# Altium PCB BBB_parport.PcbDoc (part 1 of 2)
Units mil, origin at the board's own origin, x right, y up, seen from the top; angles counter-clockwise.
Board outline 3588.03 x 5478.78 mil, 2 copper layers (Top Layer, Bottom Layer); 87 components, 119 nets, 505 pads, 175 vias.
Unrouted connection lines stored in the file: 1.
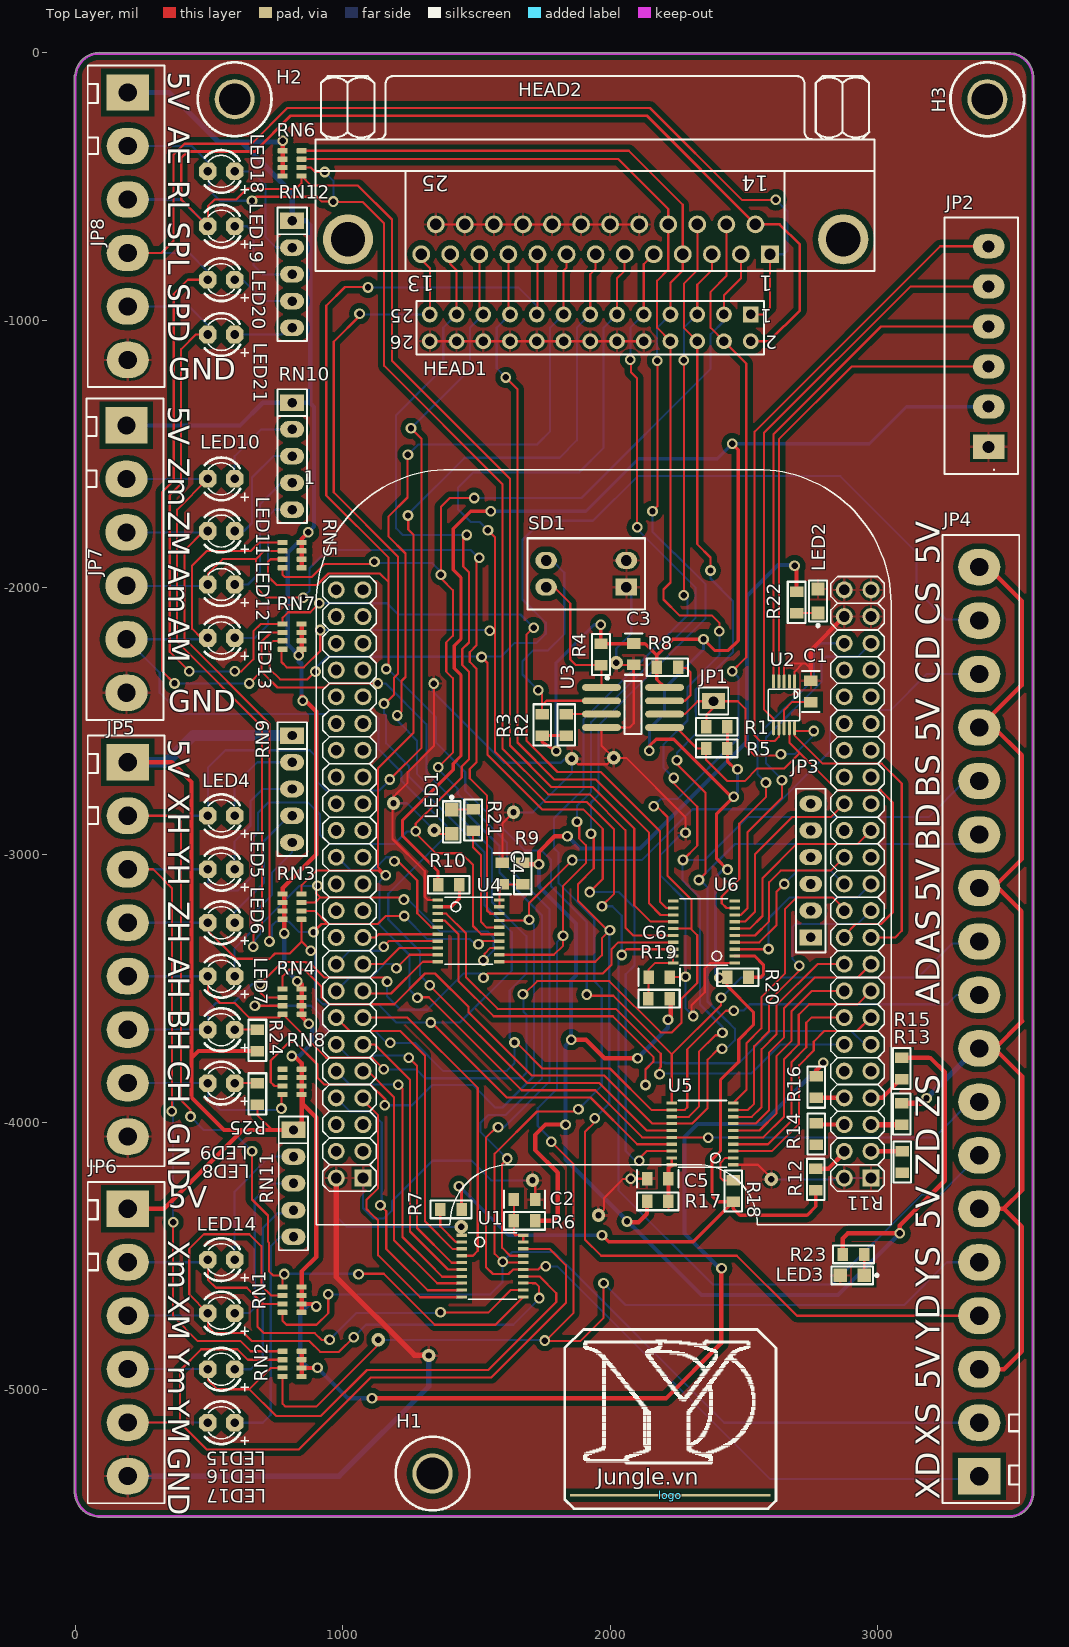
[diagram p0: Top Layer view]
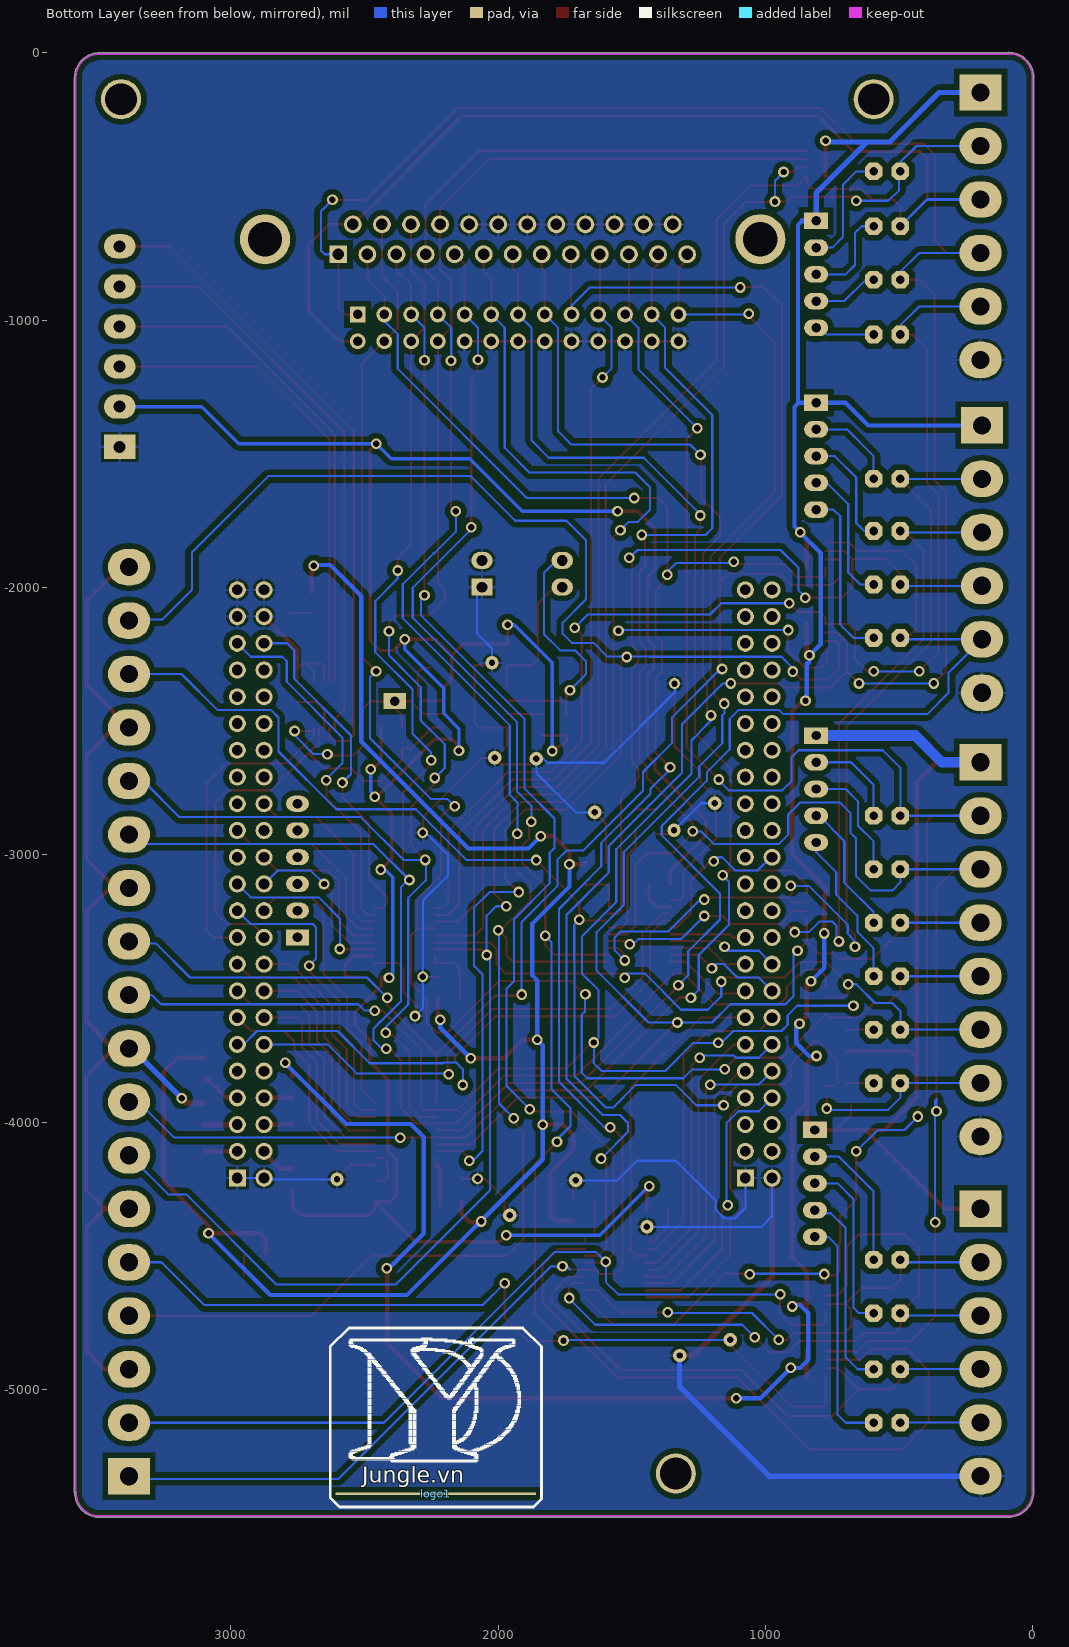
[diagram p1: Bottom Layer view, seen from below]
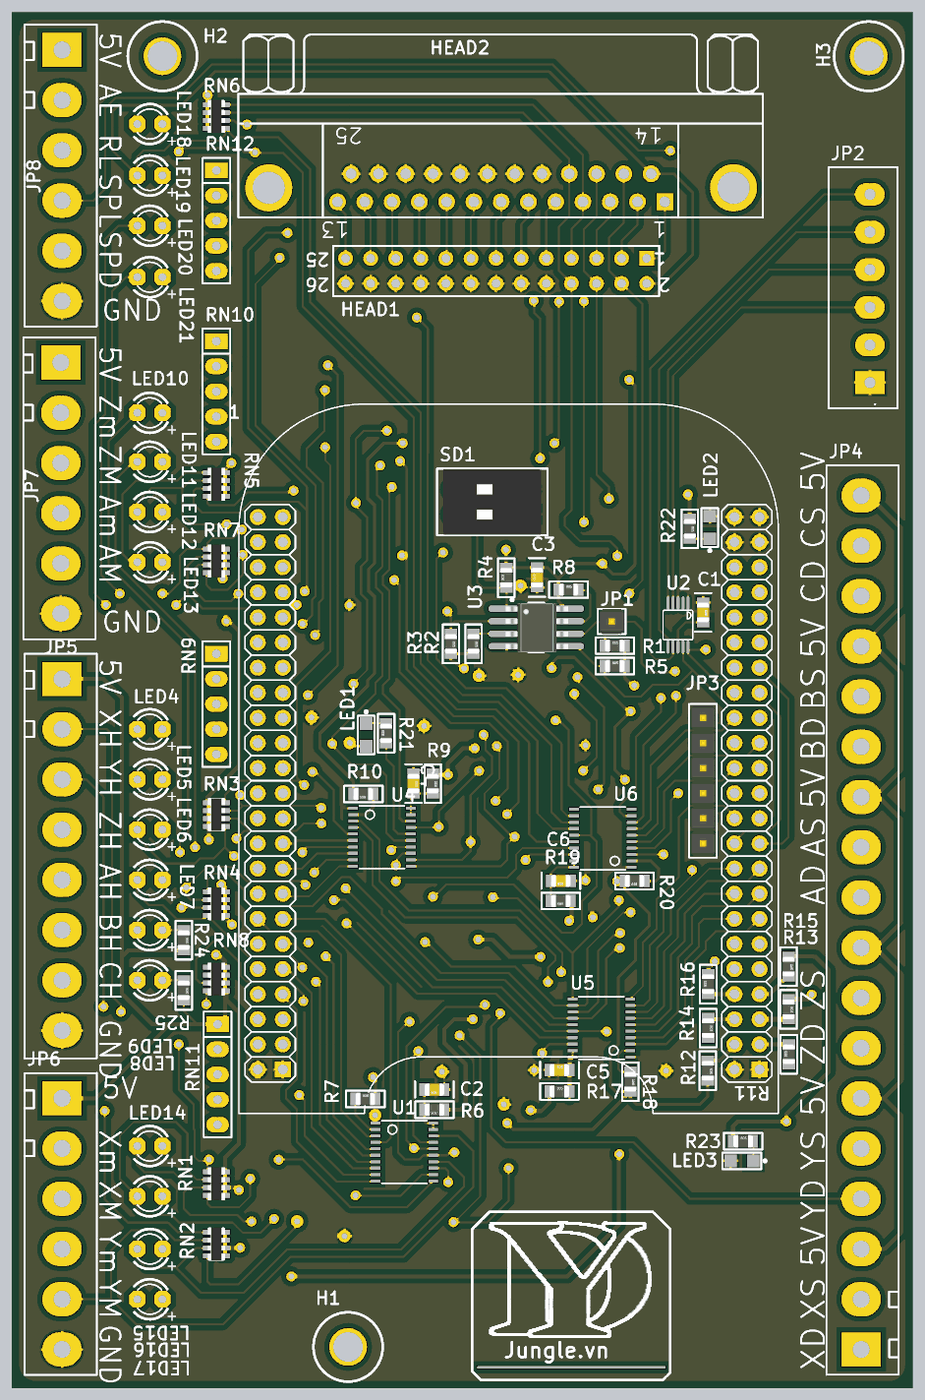
[diagram p3: 3D render of the assembled board from above, using the file's embedded part models]

## Layer stack, top to bottom
Top Solder: solder mask 0.4, Solder Resist, Dk 3.5
Top Layer: signal copper 1.4
Dielectric 1: dielectric 12.6, FR-4, Dk 4.8
Bottom Layer: signal copper 1.4
Bottom Solder: solder mask 0.4, Solder Resist, Dk 3.5

## Board outline
-2.67,-5390.72 ccw(c91.02,-5382.91) 84.7,-5476.72 ccw(c87.48,-5473.82) 87.48,-5477.83 3489.83,-5477.83 ccw(c3490.39,-5473.86) 3490.39,-5477.87 ccw(c3490.39,-5383.86) 3493.12,-5477.83 3495.87,-5477.83 ccw(c3495.87,-5473.82) 3497.12,-5477.63 ccw(c3490.39,-5383.86) 3584.38,-5386.16 ccw(c3580.83,-5384.29) 3584.84,-5384.29 3584.84,-93.82 ccw(c3490.83,-93.82) 3490.83,0.2 93.5,0.2 ccw(c91.22,-3.11) 91.22,0.9 ccw(c91.22,-93.11) -2.2,-82.56 ccw(c0.83,-85.2) -3.19,-85.2 -3.19,-5388.74 ccw(c0.83,-5388.74)

## Design rules (kind name [scope] priority, off if disabled: settings)
Clearance [All] p1: gap=20
PolygonConnect [All] p1: connectstyle=Relief reliefconductorwidth=10 reliefentries=4 polygonreliefangle="90 Angle" airgapwidth=10
RoutingVias [All] p1: holewidth=24 width=40 viastyle="Through Hole" minholewidth=24 minwidth=40 maxholewidth=24 maxwidth=40
SolderMaskExpansion [All] p1: expansion=4
Width [All] p1: maxlimit=40 minlimit=8 preferedwidth=10
29 further rules are at their usual default settings.

## Components (designator, comment, footprint, x,y, rotation, side; value= is the part's Value field where it differs from the comment)
1 "Should match A3 pinout - but not completely tested" BEAGLEBONE_SHIELD 1075.83,-4208.82 r0 top
C1 "F" 0805_C 2750.83,-2388.82 r270 top
C2 "F" 0805_C 1679.96,-4288.94 r180 top
C3 "F" 0805_C 2088.54,-2249.53 r90 top
C4 "F" 0805_C 1596.97,-3070.28 r270 top
C5 "F" 0805_C 2178.31,-4211.18 r0 top
C6 "F" 0805_C 2183.98,-3457.36 r180 top
H1 "Hole 3mm" HOLE_3MM 1335.83,-5313.82 r0 top
H2 "Hole 3mm" HOLE_3MM 595.83,-173.82 r0 top
H3 "Hole 3mm" HOLE_3MM 3410.83,-173.82 r0 top
HEAD1 "Head26" HEAD13X2 2525.83,-978.82 r180 top
HEAD2 "Head25" DB25_MALE 1945.83,-323.82 r180 top
JP1 "JP2" HEAD1 2405.83,-2403.82 r90 top
JP2 "JP6" Domino6_381 3415.83,-1473.82 r90 top
JP3 "JP6" HEAD6 2750.83,-3308.82 r90 top
JP4 "JP2" DOMINO18_508 3380.83,-5323.82 r90 top
JP5 "JP8" DOMINO8_508 195.83,-2653.82 r270 top
JP6 "JP6" DOMINO6_508 195.83,-4323.46 r270 top
JP7 "JP6" DOMINO6_508 190.83,-1393.82 r270 top
JP8 "JP6" DOMINO6_508 195.83,-148.82 r270 top
LED1 "LED0805" 0805_LED 1407.76,-2876.65 r270 top
LED2 "LED0805" 0805_LED 2777.56,-2050.51 r90 top
LED3 "LED0805" 0805_LED 2905.67,-4572.8 r180 top
LED4 "" LED3MM 545.83,-2853.82 r180 top
LED5 "" LED3MM 545.83,-3053.82 r180 top
LED6 "" LED3MM 545.83,-3253.82 r180 top
LED7 "" LED3MM 545.83,-3453.82 r180 top
LED8 "" LED3MM 545.83,-3653.82 r180 top
LED9 "" LED3MM 545.83,-3853.82 r180 top
LED10 "" LED3MM 545.83,-1593.82 r180 top
LED11 "" LED3MM 545.83,-1788.82 r180 top
LED12 "" LED3MM 545.83,-1988.82 r180 top
LED13 "" LED3MM 545.83,-2188.82 r180 top
LED14 "" LED3MM 545.83,-4513.82 r180 top
LED15 "" LED3MM 545.83,-4713.82 r180 top
LED16 "" LED3MM 545.83,-4923.82 r180 top
LED17 "" LED3MM 545.83,-5123.82 r180 top
LED18 "" LED3MM 545.83,-443.82 r180 top
LED19 "" LED3MM 545.83,-648.82 r180 top
LED20 "" LED3MM 545.83,-848.82 r180 top
LED21 "" LED3MM 545.83,-1053.82 r180 top
logo "DY_LOGO1" DYLOGO4 2225.31,-5395.08 r0 top
logo1 "DY_LOGO1" DYLOGO4 2233.46,-5389.29 r180 bottom
R1 "0805_R" 0805_R 2398.94,-2520.98 r180 top
R2 "0805_R" 0805_R 1835.83,-2513.82 r90 top
R3 "0805_R" 0805_R 1745.83,-2513.82 r90 top
R4 "0805_R" 0805_R 1966.06,-2250.35 r270 top
R5 "0805_R" 0805_R 2398.94,-2602.05 r180 top
R6 "0805_R" 0805_R 1679.96,-4368.94 r0 top
R7 "0805_R" 0805_R 1404.65,-4326.14 r180 top
R8 "0805_R" 0805_R 2214.21,-2297.87 r180 top
R9 "0805_R" 0805_R 1673.15,-3070.28 r90 top
R10 "0805_R" 0805_R 1396.5,-3111.61 r0 top
R11 "0805_R" 0805_R 3092.44,-4148.35 r270 top
R12 "0805_R" 0805_R 2769.45,-4213.5 r90 top
R13 "0805_R" 0805_R 3091.14,-3969.29 r90 top
R14 "0805_R" 0805_R 2770.83,-4043.82 r90 top
R15 "0805_R" 0805_R 3091.14,-3799.17 r90 top
R16 "0805_R" 0805_R 2770.83,-3868.82 r270 top
R17 "0805_R" 0805_R 2178.31,-4296.18 r180 top
R18 "0805_R" 0805_R 2460.75,-4257.56 r90 top
R19 "0805_R" 0805_R 2183.5,-3537.56 r0 top
R20 "0805_R" 0805_R 2477.68,-3457.83 r0 top
R21 "0805_R" 0805_R 1487.52,-2869.96 r270 top
R22 "0805_R" 0805_R 2697.56,-2055.51 r90 top
R23 "0805_R" 0805_R 2910.28,-4494.53 r180 top
R24 "0805_R" 0805_R 680.83,-3693.82 r90 top
R25 "0805_R" 0805_R 680.83,-3893.82 r90 top
RN1 "4K7" RESCAXS50P160X320X70-8N 810.83,-4663.82 r0 top
RN2 "4K7" RESCAXS50P160X320X70-8N 810.83,-4903.82 r0 top
RN3 "4K7" RESCAXS50P160X320X70-8N 810.83,-3193.82 r180 top
RN4 "4K7" RESCAXS50P160X320X70-8N 810.83,-3548.82 r0 top
RN5 "4K7" RESCAXS50P160X320X70-8N 810.83,-1878.82 r0 top
RN6 "4K7" RESCAXS50P160X320X70-8N 810.83,-413.82 r180 top
RN7 "4K7" RESCAXS50P160X320X70-8N 810.83,-2183.82 r0 top
RN8 "4K7" RESCAXS50P160X320X70-8N 810.83,-3848.82 r0 top
RN9 "330R" RN4_THROUGHHOLE 810.83,-2553.82 r270 top
RN10 "330R" RN4_THROUGHHOLE 810.83,-1308.82 r270 top
RN11 "330R" RN4_THROUGHHOLE 815.83,-4028.82 r270 top
RN12 "330R" RN4_THROUGHHOLE 810.83,-628.82 r270 top
SD1 "SW - DIP2" SW_DIP_2POS_THR 1910.83,-1948.82 r90 top
U1 "GTL2003" TSSOP20 1560.2,-4537.52 r270 top
U2 "ADS1015" VSSOP10 2650.83,-2438.82 r270 top
U3 "24LC256/SO" SOIC8_Wide 2085.83,-2448.82 r0 top
U4 "GTL2003" TSSOP20 1470.83,-3283.82 r270 top
U5 "GTL2003" TSSOP20 2345.83,-4043.82 r90 top
U6 "GTL2003" TSSOP20 2350.83,-3288.82 r90 top

## Footprints (in the part's own frame and the unit in brackets; to place one, negate y for a bottom-side part, rotate by r counter-clockwise, add the part's x,y. Pads: shape width x height; smd on the part's side, far side on the other; paste and mask are expansions set on the pad)
0805_C [mil] "Chip Resistor; Body 2.0 x 1.3 mm (LxW typ)"
  rect 39.37x50 smd: 1(-40,0) 2(40,0)
  silkscreen extent -77,-33 77,33, body extent -39,-25 39,25, height 31
0805_LED [mil] "Chip Resistor; Body 2.0 x 1.3 mm (LxW typ)"
  rect 50x50 smd: 1(-45,0) 2(45,0)
  silkscreen extent -97,-33 77,33, body extent -60,-25 60,25, height 47
0805_R [mil] "Chip Resistor; Body 2.0 x 1.3 mm (LxW typ)"
  rect 39.37x50 smd: 1(-40,0) 2(40,0)
  silkscreen extent -77,-33 77,33, body extent -39,-25 39,25, height 31
BEAGLEBONE_SHIELD [mm]
  rect 1.62x1.62 hole 1.016: 1(0,0) 47(48.26,0)
  round 1.62 hole 1.016: 2(-2.54,0) 3(0,2.54) 4(-2.54,2.54) 5(0,5.08) 6(-2.54,5.08) 7(0,7.62) 8(-2.54,7.62) 9(0,10.16) 10(-2.54,10.16) 11(0,12.7) 12(-2.54,12.7) 13(0,15.24) 14(-2.54,15.24) 15(0,17.78) 16(-2.54,17.78) 17(0,20.32) 18(-2.54,20.32) 19(0,22.86) 20(-2.54,22.86) 21(0,25.4) 22(-2.54,25.4) 23(0,27.94) 24(-2.54,27.94) 25(0,30.48) 26(-2.54,30.48) 27(0,33.02) 28(-2.54,33.02) 29(0,35.56) 30(-2.54,35.56) 31(0,38.1) 32(-2.54,38.1) 33(0,40.64) 34(-2.54,40.64) 35(0,43.18) 36(-2.54,43.18) 37(0,45.72) 38(-2.54,45.72) 39(0,48.26) 40(-2.54,48.26) 41(0,50.8) 42(-2.54,50.8) 43(0,53.34) 44(-2.54,53.34) 45(0,55.88) 46(-2.54,55.88) 48(45.72,0) 49(48.26,2.54) 50(45.72,2.54) 51(48.26,5.08) 52(45.72,5.08) 53(48.26,7.62) 54(45.72,7.62) 55(48.26,10.16) 56(45.72,10.16) 57(48.26,12.7) 58(45.72,12.7) 59(48.26,15.24) 60(45.72,15.24) 61(48.26,17.78) 62(45.72,17.78) 63(48.26,20.32) 64(45.72,20.32) 65(48.26,22.86) 66(45.72,22.86) 67(48.26,25.4) 68(45.72,25.4) 69(48.26,27.94) 70(45.72,27.94) 71(48.26,30.48) 72(45.72,30.48) 73(48.26,33.02) 74(45.72,33.02) 75(48.26,35.56) 76(45.72,35.56) 77(48.26,38.1) 78(45.72,38.1) 79(48.26,40.64) 80(45.72,40.64) 81(48.26,43.18) 82(45.72,43.18) 83(48.26,45.72) 84(45.72,45.72) 85(48.26,48.26) 86(45.72,48.26) 87(48.26,50.8) 88(45.72,50.8) 89(48.26,53.34) 90(45.72,53.34) 91(48.26,55.88) 92(45.72,55.88)
  silkscreen extent -4.44,-4.44 50.16,67.31
DB25_MALE [mm] "Connector; D Subminiature AMPLIMITE 2000; 25 Position; Right Angle"
  rect 1.69x1.69 hole 1.09: 1(-16.566,10.92)
  round 1.69 hole 1.09: 2(-13.805,10.92) 3(-11.044,10.92) 4(-8.283,10.92) 5(-5.522,10.92) 6(-2.761,10.92) 7(0,10.92) 8(2.761,10.92) 9(5.522,10.92) 10(8.283,10.92) 11(11.044,10.92) 12(13.805,10.92) 13(16.566,10.92) 14(-15.185,8.08) 15(-12.424,8.08) 16(-9.663,8.08) 17(-6.902,8.08) 18(-4.141,8.08) 19(-1.38,8.08) 20(1.381,8.08) 21(4.142,8.08) 22(6.903,8.08) 23(9.664,8.08) 24(12.425,8.08) 25(15.186,8.08)
  round 4.76 hole 3.26: ""(-23.526,9.5) ""(23.526,9.5)
  silkscreen extent -26.5,-6 26.6,12.5
Domino6_381 [mm]
  rect 2.29x3 hole 1.14: 1(0,0)
  oval 2.29x3 hole 1.14: 2(3.81,0) 3(7.62,0) 4(11.43,0) 5(15.24,0) 6(19.05,0)
  silkscreen extent -2.6,-2.77 21.78,4.2
DOMINO6_508 [mil]
  rect 136x157.48 hole 68: 1(0,0)
  oval 135.98x157.48 hole 68: 2(200,0) 3(400,0) 4(600,0) 5(800,0) 6(1000,0)
  silkscreen extent -101,-150 1101,138
DOMINO8_508 [mil]
  rect 136x157.48 hole 68: 1(0,0)
  oval 135.98x157.48 hole 68: 2(200,0) 3(400,0) 4(600,0) 5(800,0) 6(1000,0) 7(1200,0) 8(1400,0)
  silkscreen extent -101,-150 1511,138
DOMINO18_508 [mil]
  rect 136x157.48 hole 68: 1(0,0)
  oval 135.98x157.48 hole 68: 2(200,0) 3(400,0) 4(600,0) 5(800,0) 6(1000,0) 7(1200,0) 8(1400,0) 9(1600,0) 10(1800,0) 11(2000,0) 12(2200,0) 13(2400,0) 14(2600,0) 15(2800,0) 16(3000,0) 17(3200,0) 18(3400,0)
  silkscreen extent -101,-150 3521,138
DYLOGO4 [mil]
  rect 750x10 smd: 0(0,0)
  silkscreen extent -395,-50 395,620
HEAD1 [mil]
  rect 60x85 hole 36: 1(-21.51,19.13)
  silkscreen extent -72,-36 30,74, body extent -72,-31 28,69, height 374
HEAD6 [mil]
  rect 60x85 hole 36: 1(0,0)
  oval 60x85 hole 36: 2(100,0) 3(200,0) 4(300,0) 5(400,0) 6(500,0)
  silkscreen extent -56,-55 556,56, body extent -50,-50 550,50, height 374
HEAD13X2 [mm] "Connector; Header; 13x2 Position; Right Angle"
  rect 1.5x1.5 hole 0.9: 1(0,0)
  round 1.5 hole 0.9: 2(0,2.54) 3(2.54,0) 4(2.54,2.54) 5(5.08,0) 6(5.08,2.54) 7(7.62,0) 8(7.62,2.54) 9(10.16,0) 10(10.16,2.54) 11(12.7,0) 12(12.7,2.54) 13(15.24,0) 14(15.24,2.54) 15(17.78,0) 16(17.78,2.54) 17(20.32,0) 18(20.32,2.54) 19(22.86,0) 20(22.86,2.54) 21(25.4,0) 22(25.4,2.54) 23(27.94,0) 24(27.94,2.54) 25(30.48,0) 26(30.48,2.54)
  silkscreen extent -1.27,-1.27 31.75,3.81
HOLE_3MM [mil]
  round 150 hole 118: 0(0,0)
  silkscreen extent -138,-138 138,138
LED3MM [mil]
  oct 66x66 hole 32: A(-50,0) K(50,0)
  silkscreen extent -102,-80 62,83
RESCAXS50P160X320X70-8N [mm] "Resistor Pack, Body 1.6x3.2mm, 4x0603, IPC Medium Density"
  round 0.254 on Mech15: 0(0,0)
  rrect25% 0.95x0.5 smd: 1(-0.9,1.2) 2(-0.9,0.4) 3(-0.9,-0.4) 4(-0.9,-1.2) 5(0.9,-1.2) 6(0.9,-0.4) 7(0.9,0.4) 8(0.9,1.2)
  Top Layer pour cut-out: -0.4,1.7 0.4,1.7 0.4,-1.7 -0.4,-1.7
  body extent -0.87,-1.68 0.88,1.67, height 0.7
RN4_THROUGHHOLE [mil] "R SIP4, 5 Pin"
  rect 62x90 hole 35: 1(0,0)
  oval 62x90 hole 35: 2(100,0) 3(200,0) 4(300,0) 5(400,0)
  silkscreen extent -50,-55 450,55
SOIC8_Wide [mm] "SOIC, 8-Leads, Body 4.9x3.9mm, Pitch 1.27mm, IPC Low Density"
  oval 3.7x0.65 smd: 1(-2.995,1.905) 2(-2.995,0.635) 3(-2.995,-0.635) 4(-2.995,-1.905) 5(2.995,-1.905) 6(2.995,-0.635) 7(2.995,0.635) 8(2.995,1.905)
  silkscreen extent -2.57,-2.5 0.8,2.93, body extent -3.1,-2.52 3.24,2.49, height 1.76
SW_DIP_2POS_THR [mil] "DipSwitch 2"
  rect 64x80 hole 40: 1(-50,-150)
  oval 64x80 hole 40: 2(50,-150) 3(50,150) 4(-50,150)
  silkscreen extent -133,-220 133,220, body extent -131,-195 131,195, height 280
TSSOP20 [mil]
  rect 12x39 smd: 1(-115.16,-114.87) 2(-89.57,-114.87) 3(-63.98,-114.87) 4(-38.39,-114.87) 5(-12.8,-114.87) 6(13,-114.87) 7(39,-114.87) 8(64,-114.87) 9(90,-114.87) 10(116,-114.87) 11(116,115) 12(90,115) 13(64,115) 14(39,115) 15(13,115) 16(-12.8,115) 17(-38.39,115) 18(-63.98,115) 19(-89.57,115) 20(-115.16,115)
  silkscreen extent -125,-90 125,90
VSSOP10 [mm]
  oval 1.35x0.3 smd paste+0 mask+0.051: 1(-2.225,1) 2(-2.225,0.5) 3(-2.225,0) 4(-2.225,-0.5) 5(-2.225,-1) 6(2.225,-1) 7(2.225,-0.5) 8(2.225,0) 9(2.225,0.5) 10(2.225,1)
  silkscreen extent -1.5,-1.51 1.5,1.48

## Part data
1: library part BEAGLEBONE_OUTLINE
C1 C2 C3 C4 C5 C6: library part 0805_C, "0805 SMD capacitor"
H1 H2 H3: library part Hole_3mm
JP1: library part Head1, "Connector 1"
JP2 JP3 JP6 JP7 JP8: library part HEAD6, "Connector 6"
JP4: library part Head18
JP5: library part HEAD8, "Connector 8"
LED1 LED2 LED3: "LED Single colour Green and Red"
LED4 LED5 LED6 LED7 LED8 LED9 LED10 LED11 LED12 LED13 LED14 LED15 LED16 LED17 LED18 LED19 LED20 LED21: library part LED3MM
R1 R2 R3 R4 R5 R6 R7 R8 R9 R10 R11 R12 R13 R14 R15 R16 R17 R18 R19 R20 R21 R22 R23 R24 R25: "0805 SMD resistor"
RN1 RN2 RN3 RN4 RN5 RN6 RN7 RN8: library part RN4, "Resistor 4 (thanh)"
RN9 RN10 RN11 RN12: library part RN4_th, "Resistor 4 (thanh)"
SD1: library part SWDIP-2, "DIP Switch, 2 Position, SPST"

## Via types
v1: diameter 40, hole 24, Top Layer to Bottom Layer, 163 vias
v2: diameter 50, hole 24, Top Layer to Bottom Layer, 12 vias

## Nets (pads, with @x,y where several pads share a name; then routed paths per layer and width w, separated by ;. In a path a pad name is that pad's centre, name@x,y a point inside that pad or via, vN(x,y) a via of type N, cw(c..) or ccw(c..) an arc to the next point about the centre after c; other vN are vias at no path point)
ADIR: 1.67 U5.9 | length 1157.4
  Top Layer w8: U5.9@2460.7,-3953.82 2515.83,-3953.82 2538.83,-3930.82 2538.83,-3715.42 2593.83,-3660.42 2593.83,-3547.51 2707.68,-3433.66 2707.68,-3414.8 v1(2707.17,-3414.29)
  Bottom Layer w8: v1@2697.13,-3414.29 v1(2707.17,-3414.29) 2681.66,-3388.79 2681.66,-3270.19 2692.72,-3259.13 2928.54,-3259.13 ; 2928.54,-3256.1 1.67@2975.83,-3208.82
ADIR2: HEAD1.15 HEAD2.8 JP4.10 RN4.3 U5.12 | length 7157
  Top Layer w8: v1(671.57,-3564.57) RN4.3@775.39,-3564.57 ; v1(1204.33,-2478.62) 1219.72,-2463.23 1219.72,-2349.78 1234.8,-2334.71 1234.8,-1872.92 1170.79,-1808.91 1170.79,-1734.92 1242.12,-1663.59 1242.12,-1503.9 v1(1243.84,-1503.9) ; v1@1655.97,-3708.77 1745.98,-3798.78 1999.49,-3798.78 2154.53,-3953.82 U5.12@2230.83,-3953.82 2279.49,-3953.82 2288.58,-3944.72 2288.58,-3727.45 2433.08,-3582.95 v1@2443.86,-3582.95 ; HEAD1.15@1825.83,-978.82 1825.83,-815.59 1837.13,-804.29 HEAD2.8@1837.13,-753.74
  Bottom Layer w8: v1(671.57,-3564.57) 881.57,-3564.57 917.26,-3600.26 917.26,-3635.26 940.83,-3658.82 1119.96,-3658.82 1119.96,-3658.23 1164.96,-3703.23 v1(1177.2,-3703.23) 1270.08,-3703.23 1374.6,-3807.75 1613.59,-3807.75 1642.55,-3778.79 1642.55,-3768.48 1642.4,-3768.62 v1(1642.4,-3701.73) 1624.45,-3683.78 1624.45,-3507.01 1686.69,-3444.76 1686.69,-3304.29 1558.5,-3176.1 1558.5,-2978.51 1277.24,-2697.25 1277.24,-2572.24 1246.65,-2541.65 1246.65,-2540.04 1204.33,-2497.72 v1(1204.33,-2478.62) ; v1(1243.84,-1503.9) 1282.67,-1465.08 1726.61,-1465.08 1775.83,-1415.87 1775.83,-1028.82 HEAD1.15@1825.83,-978.82 ; v1(2461.93,-3582.64) 2498.75,-3582.64 2522.57,-3558.82 3261.54,-3558.82 3296.54,-3523.82 JP4.10@3380.83,-3523.82
AHOME: 1.73 U6.6 | length 745
  Top Layer w8: U6.6@2465.7,-3275.82 2522.92,-3275.82 2569.92,-3228.82 2569.92,-3087.29 2698.39,-2958.82 2925.83,-2958.82 1.73@2975.83,-2908.82
AHOME2: HEAD1.4 HEAD2.15 JP5.5 LED7.K RN4.4 U6.15 | length 6163.5
  Top Layer w8: LED7.K@495.83,-3453.82 495.83,-3508.82 540.83,-3553.82 595.83,-3553.82 650.83,-3608.82 762.64,-3608.82 RN4.4@775.39,-3596.06 938.15,-3758.82 1110.83,-3758.82 1153.31,-3801.3 v1(1153.31,-3802.4) ; v1@1677.64,-3521.81 1727.13,-3472.32 1997.14,-3472.32 2188.87,-3664.06 2231.67,-3664.06 2267.19,-3628.54 2267.19,-3538.24 2326.06,-3479.37 2326.06,-3300.47 2301.41,-3275.82 U6.15@2235.83,-3275.82 ; v1(2162.76,-2818.43) 2174.77,-2818.43 2214.57,-2858.23 2214.57,-3077.72 2304.29,-3167.44 2304.29,-3275.82 ; HEAD2.15@2434.98,-641.93 2434.98,-835.06 2375.83,-894.21 2375.83,-1028.82 HEAD1.4@2425.83,-1078.82 2509.33,-1162.32 2509.33,-2260.94 v1@2446.73,-2323.54
  Bottom Layer w8: JP5.5@190.83,-3453.82 LED7.K@495.83,-3453.82 ; v1(1153.31,-3802.4) 1274.65,-3802.4 1308,-3835.75 1667.17,-3835.75 1687.41,-3815.5 1687.41,-3598.04 1675.47,-3586.1 1675.47,-3522.32 v1(1673.98,-3520.83) ; v1(2162.76,-2818.43) 2190.55,-2790.63 2252.46,-2790.63 2480.13,-2562.97 2480.13,-2336.62 v1@2452.13,-2308.62
  other v1: 2456.89,-2313.39
AMAX: 1.62 U5.6 | length 822.2
  Top Layer w8: U5.6@2460.7,-4030.82 2558.83,-4030.82 2622.83,-3966.82 2622.83,-3751.82 2677.83,-3696.82 2677.83,-3586.01 2755.02,-3508.82 1.62@2875.83,-3508.82
AMAX2: JP7.5 LED13.K RN5.1 U5.15 | length 4494.8
  Top Layer w8: LED13.K@495.83,-2188.82 470.83,-2188.82 436.83,-2154.82 436.83,-1917.82 490.83,-1863.82 655.83,-1863.82 688.07,-1831.57 RN5.1@775.39,-1831.57 ; v1(1326.07,-3487.62) 1331.5,-3493.04 1331.5,-3494.84 1689.65,-3852.99 1959.84,-3852.99 2137.67,-4030.82 U5.15@2230.83,-4030.82
  Bottom Layer w8: LED13.K@490.83,-2193.82 JP7.5@190.83,-2193.82 315.83,-2318.82 315.83,-2393.82 395.83,-2473.82 934.46,-2473.82 949.46,-2458.82 1101.85,-2458.82 1134.26,-2491.23 1134.26,-2605.09 1219.69,-2690.51 1219.69,-2723.15 1388.7,-2892.17 1388.7,-2926.93 1170.43,-3145.2 1170.43,-3241.85 1289.21,-3360.63 1289.21,-3450.76 v1(1326.07,-3487.62)
AMIN: 1.58 U4.3 | length 2001.9
  Top Layer w8: U4.3@1355.95,-3219.84 1387.72,-3219.84 1461.1,-3293.22 1461.04,-3293.29 1461.04,-3457.61 1579.29,-3575.87 2021.49,-3575.87 2189.69,-3744.07 2189.69,-3793.62 2185.67,-3797.65 2185.67,-3821.38 v1@2176,-3811.71
  Bottom Layer w8: v1@2170.67,-3820.83 v1(2185.12,-3820.83) ; v1@2173.35,-3817.68 2200.94,-3817.68 2201.5,-3817.13 2529.02,-3817.13 2637.32,-3708.82 1.58@2875.83,-3708.82
AMIN2: JP7.4 LED12.K RN5.2 U4.18 | length 3177
  Top Layer w8: LED12.K@495.83,-1988.82 495.83,-1948.82 550.83,-1893.82 675.83,-1893.82 ; RN5.2@775.39,-1863.07 706.57,-1863.07 675.83,-1893.82 ; v1(852.01,-2037.89) 714.17,-2037.87 675.83,-1999.53 675.83,-1893.82 ; v1(852.01,-2037.89) v1@858.05,-2037.89 ; v1(1510.2,-1889.02) 1500.01,-1899.2 1500.01,-2217.1 1475.29,-2241.81 1475.29,-2278.26 1500.01,-2302.98 1500.01,-2654.29 1475.29,-2679 1475.29,-2713.72 1540.24,-2778.66 1540.24,-3207.64
  Top Layer w10: 1540.24,-3207.64 1552.44,-3219.84 U4.18@1585.83,-3219.84
  Bottom Layer w8: JP7.4@190.83,-1993.82 LED12.K@490.83,-1993.82 ; v1@862.32,-2034.84 862.32,-2025.87 876.38,-2011.81 876.38,-1927.36 944.17,-1859.57 1479.25,-1859.57 v1@1509.45,-1889.76
ASTEP: 1.68 U5.10 | length 1078
  Top Layer w8: U5.10@2460.7,-3927.82 2510.83,-3877.69 2510.83,-3703.82 2565.83,-3648.82 2565.83,-3532.2 2653.66,-3444.37 2653.66,-3203.82 2698.66,-3158.82 2711.96,-3158.82 ; 2703.39,-3158.78 2832.56,-3158.82 2875.83,-3202.09 1.68@2875.83,-3208.82
ASTEP2: HEAD1.17 HEAD2.9 JP4.11 RN5.3 U5.11 | length 6700.8
  Top Layer w8: RN5.3@775.39,-1894.57 730.08,-1894.57 720.83,-1903.82 720.83,-1958.82 752.91,-1990.91 903.74,-1990.91 946.99,-1947.66 1138.72,-1947.66 1171.73,-1980.67 ; v1(1094.61,-877.72) 1093.27,-876.38 1008.54,-876.38 938.39,-946.54 938.39,-1655.71 1171.73,-1889.06 1171.73,-1980.67 ; v1@1171.73,-2304.92 1171.73,-1980.67 ; HEAD1.17@1725.83,-978.82 1728.43,-976.22 HEAD2.9@1728.43,-753.74 ; v1@1909.13,-3526.02 v1(1912.56,-3522.6) 1916.87,-3526.91 2012.13,-3526.91 2230.83,-3745.61 ; U5.11@2230.83,-3927.82 2230.83,-3745.61 ; v1(2415.12,-3534.61) 2415.12,-3561.32 2230.83,-3745.61
  Bottom Layer w8: v1(1094.61,-877.72) 1656.89,-877.72 1725.83,-946.65 HEAD1.17@1725.83,-978.82 ; v1@1170.65,-2306 1349.49,-2484.84 1349.49,-2581.34 1458.46,-2690.31 1458.46,-2759.68 1682.96,-2984.17 1744.71,-2984.17 1779.02,-3018.48 1779.02,-3117.78 1912.56,-3251.32 v1(1912.56,-3522.6) ; v1(2415.12,-3534.61) 2490.91,-3458.82 3152.72,-3458.82 3280.39,-3331.14 3334.54,-3331.14 3362.22,-3358.83 3385.42,-3358.83 JP4.11@3400.63,-3343.62
  other v1: 1162.8,-2304.88
AUDIO1: 1.71
AXES_ENABLE: 1.72 U6.5 | length 617.4
  Top Layer w8: U6.5@2465.7,-3301.61 2542.01,-3301.61 2594.92,-3248.7 2594.92,-3101.89 2637.99,-3058.82 2825.83,-3058.82 1.72@2875.83,-3008.82
AXES_ENABLE2: JP8.2 LED18.K RN6.2 U6.16 | length 4663.6
  Top Layer w8: v1(660.83,-553.82) 675.83,-538.82 903.5,-538.82 921.38,-556.69 v1(964.96,-556.69) ; RN6.2@846.26,-429.57 881.57,-429.57 898.19,-446.18 v1(932.83,-446.18) ; v1@964.96,-539.25 984.06,-558.35 1074.92,-558.35 1155.04,-638.46 1155.04,-1171.3 1597.68,-1613.94 1597.68,-1732.76 1597.39,-1733.05 1597.39,-2602.81 1768.51,-2773.92 1923.35,-2773.92 2057.2,-2907.78 2057.2,-3271.73 2087.09,-3301.61 U6.16@2235.83,-3301.61
  Bottom Layer w8: JP8.2@195.83,-348.82 435.83,-348.82 495.83,-408.82 LED18.K@495.83,-443.82 500.83,-448.82 500.83,-513.82 540.83,-553.82 v1(660.83,-553.82) ; v1(932.83,-446.18) 964.96,-478.31 v1(964.96,-556.69)
BDIR: 1.63 U5.7 | length 952.4
  Top Layer w8: U5.7@2460.7,-4004.82 2544.42,-4004.82 2594.83,-3954.42 2594.83,-3738.61 2649.83,-3683.61 2649.83,-3574.42 2765.37,-3458.87 2902.19,-3458.82 2925.83,-3458.82 1.63@2975.83,-3408.82
BDIR2: HEAD1.6 HEAD2.16 JP4.13 RN4.1 U5.14 | length 6796.4
  Top Layer w8: RN4.1@775.39,-3501.57 775.39,-3454.25 800.83,-3428.82 849,-3428.82 851,-3430.82 857.83,-3430.82 920.83,-3493.82 920.83,-3531.6 948.05,-3558.82 1192.6,-3558.82 1307.83,-3443.58 1345.32,-3443.58 1470.31,-3568.58 1470.31,-3589.02 1706.65,-3825.35 1978.11,-3825.35 2157.57,-4004.82 U5.14@2230.83,-4004.82 2306.72,-4004.82 2364.84,-3946.69 2364.84,-3765.98 v1@2403.43,-3727.4 ; v1@2250.16,-2660.55 2356.38,-2766.77 2356.38,-3069.9 v1(2332.19,-3094.09) ; HEAD2.16@2326.28,-641.93 2326.28,-813.21 2275.83,-863.66 2275.83,-1028.82 HEAD1.6@2325.83,-1078.82 2325.83,-1837.99 2375.59,-1887.76 v1(2375.59,-1936.38)
  Bottom Layer w8: v1@2250.87,-2653.03 2250.87,-2617.2 2320.71,-2547.36 2320.71,-2465.78 2320.2,-2465.27 2320.2,-2381.8 2459.97,-2242.03 2459.97,-2050.95 2375.59,-1966.57 v1(2375.59,-1936.38) ; v1(2418.78,-3725.35) 2434.88,-3725.35 2466.77,-3693.46 2466.77,-3649.73 2438.39,-3621.35 2437.44,-3621.35 2364.33,-3548.24 2364.33,-3121.73 2336.69,-3094.09 v1(2332.19,-3094.09) 2467.18,-2959.09 3345.55,-2959.09 JP4.13@3380.83,-2923.82
  other v1: 2250.04,-2646.46
BHOME: 1.70 U6.4 | length 615.4
  Top Layer w8: U6.4@2465.7,-3327.2 2558.23,-3327.2 2622.6,-3262.83 2622.6,-3137.8 v1(2651.42,-3108.98)
  Bottom Layer w8: v1@2651.08,-3108.64 2700.91,-3058.82 2825.83,-3058.82 1.70@2875.83,-3108.82
BHOME2: JP5.6 LED8.K RN4.2 U6.17 | length 2580.1
  Top Layer w8: RN4.2@775.39,-3533.07 710.08,-3533.07 690.83,-3513.82 v1(690.83,-3483.82) 773.83,-3400.82 860.6,-3400.82 862.6,-3402.82 874.83,-3402.82 930.83,-3458.82 1155.83,-3458.82 1165.83,-3468.82 v1(1165.83,-3473.82) ; v1(1526.42,-3459.53) 1541.62,-3444.32 1971.5,-3444.32 2005.87,-3409.96 2005.87,-3352.09 2030.75,-3327.2 U6.17@2235.83,-3327.2
  Bottom Layer w8: JP5.6@190.83,-3653.82 LED8.K@495.83,-3653.82 495.83,-3583.82 525.83,-3553.82 590.83,-3553.82 660.83,-3483.82 v1(690.83,-3483.82) ; v1(1165.83,-3473.82) 1165.83,-3528.94 1216.06,-3579.17 1316.22,-3579.17 1452.09,-3443.31 1520.35,-3443.31 1526.42,-3449.37 v1(1526.42,-3459.53)
BSTEP: 1.64 U5.8 | length 842
  Top Layer w8: U5.8@2460.7,-3979.82 2529.83,-3979.82 2566.83,-3942.82 2566.83,-3727.01 2621.83,-3672.01 2621.83,-3562.82 2775.83,-3408.82 1.64@2875.83,-3408.82
BSTEP2: HEAD1.8 HEAD2.17 JP4.14 RN6.3 U5.13 | length 6627.2
  Top Layer w8: RN6.3@846.26,-398.07 2031.38,-398.07 2217.58,-584.27 HEAD2.17@2217.58,-641.93 2217.58,-810.89 2175.83,-852.64 2175.83,-1028.82 HEAD1.8@2225.83,-1078.82 2225.83,-1981.57 2199.96,-2007.44 2199.96,-2044.72 2260.43,-2105.2 2381.5,-2105.2 2408.54,-2132.24 v1(2408.54,-2164.21) ; U5.13@2230.83,-3979.82 2294.04,-3979.82 2332.05,-3941.81 2332.05,-3736.67 2394.2,-3674.52 2416.83,-3674.52 2420.18,-3671.17 v1(2420.17,-3665.35) ; v1@2236.1,-2729.76 2325.94,-2819.61 2325.94,-2965.63 v1(2272.6,-3018.98)
  Bottom Layer w8: v1(2237.68,-2712.36) 2200.28,-2674.96 2200.28,-2586.89 2289.69,-2497.48 2289.69,-2372.72 2408.54,-2253.86 v1(2408.54,-2164.21) ; v1(2420.17,-3665.35) 2420.17,-3671.15 2420.18,-3643.69 2336.33,-3559.83 2336.33,-3160.46 2270.79,-3094.92 2270.79,-3020.79 v1(2272.6,-3018.98) 2353.74,-3018.98 2513.9,-2858.82 3191.93,-2858.82 3326.93,-2723.82 JP4.14@3380.83,-2723.82
CDIR: 1.57 U4.4 | length 2266.4
  Top Layer w8: U4.4@1355.95,-3245.43 1382.13,-3245.43 1433.04,-3296.35 1433.04,-3472.29 1564.61,-3603.87 2009.89,-3603.87 2161.69,-3755.67 2161.69,-3774.02 2161.3,-3774.02 2132.44,-3802.87 v1(2132.44,-3860.59)
  Bottom Layer w8: v1@2132.44,-3865.91 v1(2132.44,-3860.59) ; 2132.44,-3821.34 v1(2132.44,-3860.59) ; 1.57@2975.83,-3708.82 2952.19,-3708.82 2902.19,-3658.82 2601.1,-3658.82 2480.69,-3779.24 2205.75,-3779.24 2203.34,-3776.83 2156.91,-3776.83 2132.44,-3801.3 v1(2132.44,-3860.59)
CDIR2: JP4.16 RN8.3 U4.17 | length 4292.1
  Top Layer w8: RN8.3@775.39,-3864.57 745.08,-3864.57 730.83,-3850.31 730.83,-3768.82 800.83,-3698.82 820.83,-3698.82 905.83,-3783.82 905.83,-3833.82 930.83,-3858.82 1103.39,-3858.82 1159.8,-3915.24 1159.8,-3934.14 v1(1157.3,-3936.65) ; U4.17@1585.83,-3245.43 1641.69,-3245.43 1694.26,-3245.42 v1(1696.97,-3242.72) 1696.97,-3180.71 v1(1858.15,-3019.53)
  Bottom Layer w8: v1(1157.3,-3936.65) 1259.37,-3936.65 1335.63,-3860.39 1486.1,-3860.39 1570.48,-3944.77 1597.74,-3944.77 1715.41,-3827.1 1715.41,-3762.55 1716.96,-3761 1715.41,-3759.45 1715.41,-3399.71 1715.59,-3399.53 1715.59,-3261.34 1699.68,-3245.42 v1@1689.56,-3245.42 ; v1(1858.15,-3019.53) 2117.83,-3019.53 2308.03,-2829.33 2606.18,-2829.33 2821.83,-2613.69 2821.83,-2486.45 2849.46,-2458.82 3049.45,-2458.82 3184.45,-2323.82 JP4.16@3380.83,-2323.82
CHOME2: JP5.7 LED9.K RN8.4 | length 707
  Top Layer w8: v1(770.83,-3948.82) 770.83,-3903.98 RN8.4@775.39,-3899.41
  Bottom Layer w8: JP5.7@190.83,-3853.82 LED9.K@495.83,-3853.82 495.83,-3908.82 540.83,-3953.82 765.83,-3953.82 v1(770.83,-3948.82)
CSTEP: 1.59 U5.3 | length 817
  Top Layer w8: U5.3@2460.7,-4107.8 2604.17,-4107.8 2604.17,-4108.01 2706.83,-4005.36 2706.83,-3786.61 2761.83,-3731.61 2761.83,-3698.41 2801.42,-3658.82 2849.46,-3658.82 ; 2902.19,-3658.82 2923.46,-3658.82 2973.46,-3608.82 1.59@2975.83,-3608.82
CSTEP2: JP4.17 RN7.3 U5.18 | length 6278.6
  Top Layer w8: RN7.3@775.39,-2199.57 740.08,-2199.57 725.83,-2213.82 725.83,-2303.82 765.83,-2343.82 868.54,-2343.82 v1(897.95,-2314.41) ; v1(1519.29,-2260.04) 1541.39,-2282.14 1541.39,-2626 1745.31,-2829.92 1899.57,-2829.92 1972.56,-2902.91 1972.56,-3090.41 v1@1925.83,-3137.14 ; v1(2108.82,-4143.54) 2108.82,-4135.47 2136.5,-4107.8 U5.18@2230.83,-4107.8
  Bottom Layer w8: v1(897.95,-2314.41) 897.95,-2301.69 940.83,-2258.82 1432.92,-2258.82 ; 1426.14,-2258.66 1591.85,-2258.66 1643.39,-2207.12 1725.24,-2207.12 1759.33,-2173.03 1759.33,-2131.89 1672.36,-2044.92 1672.36,-1822.44 1744.51,-1750.3 1936.2,-1750.3 2102.87,-1583.62 2860.67,-1583.62 3145.31,-1868.27 3145.31,-2008.7 3256.06,-2119.45 3376.46,-2119.45 JP4.17@3380.83,-2123.82 ; v1@1925.57,-3137.4 v1(1923.8,-3139.16) 2032.2,-3139.17 2091.02,-3197.99 2091.02,-3413.7 2058.79,-3445.94 2058.79,-4107.76 2094.57,-4143.54 v1(2108.82,-4143.54)
ESTOP_EXT: 1.87 U6.8 | length 1359.4
  Top Layer w8: U6.8@2465.7,-3224.82 2489,-3224.82 2513.31,-3200.51 2513.31,-2916.22 2642.78,-2786.75 v1(2642.78,-2720.58)
  Bottom Layer w8: v1(2642.78,-2720.58) 2638.9,-2716.7 2638.9,-2713.5 2582.87,-2657.48 2582.87,-2560.79 2791.03,-2352.63 2791.03,-2276.06 2808.27,-2258.82 2925.83,-2258.82 1.87@2975.83,-2208.82
ESTOP_EXT2: HEAD1.19 HEAD2.10 U6.13 | length 2886.4
  Top Layer w8: v1(1609.92,-1214.49) 1653.68,-1258.25 1653.68,-1755.96 1653.39,-1756.25 1653.39,-2579.61 1791.71,-2717.92 1946.54,-2717.92 2146.02,-2917.4 2146.02,-3182.13 2188.72,-3224.82 U6.13@2235.83,-3224.82 ; HEAD2.10@1619.72,-753.74 1619.72,-972.72 HEAD1.19@1625.83,-978.82
  Bottom Layer w8: v1(1609.92,-1214.49) 1609.65,-1214.49 1575.83,-1180.67 1575.83,-1028.82 HEAD1.19@1625.83,-978.82
GND: 1.1 1.2 1.47 1.48 1.89 1.90 1.91 1.92 C1.1 C2.1 C3.1 C4.1 C5.1 C6.1 HEAD1.10 HEAD1.12 HEAD1.14 HEAD1.16 HEAD1.18 HEAD1.20 HEAD1.22 HEAD1.24 HEAD1.26 HEAD2.18 HEAD2.19 HEAD2.20 HEAD2.21 HEAD2.22 HEAD2.23 HEAD2.24 HEAD2.25 JP2.1 JP5.8 JP6.6 JP7.6 JP8.6 LED1.2 LED2.2 LED3.2 SD1.1 SD1.2 U1.1 U2.1 U2.3 U3.4 U4.1 U5.1 U6.1 | length 11855.3
  Top Layer w8: HEAD1.26@1325.83,-1078.82 HEAD1.24@1425.83,-1078.82 HEAD1.22@1525.83,-1078.82 HEAD1.20@1625.83,-1078.82 HEAD1.18@1725.83,-1078.82 HEAD1.16@1825.83,-1078.82 HEAD1.14@1925.83,-1078.82 HEAD1.12@2025.83,-1078.82 HEAD1.10@2125.83,-1078.82 ; v2@1333.44,-2908.32 v2(1342.62,-2908.32) 1342.7,-2908.23 1343.74,-2908.23 1357.17,-2921.65 LED1.2@1407.76,-2921.65 ; v1(1340.91,-2359.41) 1340.91,-2592.66 1242.93,-2690.64 1242.93,-2729.99 1189.98,-2782.93 v2(1189.98,-2806.78) 1186.14,-2810.62 1186.14,-2940.69 1306.98,-3061.52 1306.98,-3157.65 1317.99,-3168.66 U4.1@1355.95,-3168.66 ; HEAD2.25@1347.97,-641.93 HEAD2.24@1456.67,-641.93 HEAD2.23@1565.37,-641.93 HEAD2.22@1674.07,-641.93 HEAD2.21@1782.78,-641.93 HEAD2.20@1891.48,-641.93 HEAD2.19@2000.18,-641.93 HEAD2.18@2108.88,-641.93 ; v2(1443.83,-4391.18) 1443.83,-4385.77 1444.61,-4385 1445.32,-4385.72 U1.1@1445.32,-4422.36 ; C4.1@1596.97,-3030.28 1596.97,-2882.68 v2(1638.58,-2841.06) ; v2(1709.65,-4217.4) 1719.96,-4227.72 C2.1@1719.96,-4288.94 ; v2@1859.84,-2638.01 v2(1857.18,-2640.67) 1859.81,-2640.67 1880.12,-2660.98 1989.88,-2660.98 v2(2013.54,-2637.32) ; v2(1956.69,-4348.07) 1977.2,-4327.56 1977.2,-4283.98 2049.45,-4211.73 v1(2077.2,-4211.73) 2077.83,-4211.1 2092.44,-4211.1 2092.52,-4211.18 C5.1@2138.31,-4211.18 ; v2(2023.27,-2282.13) 2030.67,-2289.53 C3.1@2088.54,-2289.53 2088.54,-2319.61 ; 2088.58,-2319.65 2088.58,-2508.31 2073.07,-2523.82 U3.4@1967.91,-2523.82 1967.91,-2591.69 v2(2013.54,-2637.32) ; C6.1@2223.98,-3457.36 2280.25,-3457.36 v1(2282.03,-3455.58) ; v1(2281.94,-2917.64) 2281.94,-2858.76 2060.51,-2637.32 v2(2013.54,-2637.32) ; v1(2311.19,-3603.02) 2304.65,-3596.48 2304.65,-3563.07 2354.06,-3513.65 2354.06,-3425.35 2375.43,-3403.98 U6.1@2465.7,-3403.98 ; U5.1@2460.7,-4158.98 2553.39,-4158.98 2605.59,-4211.18 v2(2603.07,-4213.7) ; U2.3@2650.83,-2351.22 2650.83,-2294.49 2661.5,-2283.82 2721.14,-2283.82 ; U2.1@2690.2,-2351.22 2690.2,-2314.76 2721.14,-2283.82 ; C1.1@2750.83,-2348.82 2750.83,-2304.37 2730.28,-2283.82 2721.14,-2283.82
  Top Layer w16: 2750.83,-2304.37 2750.83,-2233.82 1.90@2875.83,-2108.82
  Top Layer w20: 1.2@975.83,-4208.82 975.83,-4578.58 1268.11,-4870.87 1320.39,-4870.87 v2(1321.81,-4872.28)
  Bottom Layer w8: 1.2@975.83,-4208.82 975.83,-4352.05 1014.96,-4391.18 v2(1443.83,-4391.18) ; 1.1@1075.83,-4208.82 1075.83,-4320.79 1115.12,-4360.08 1154.04,-4360.08 1185.1,-4329.01 1185.1,-4294.43 1335.55,-4143.98 1482.05,-4143.98 1555.47,-4217.4 v2(1709.65,-4217.4) ; v2(1189.98,-2806.78) 1241.08,-2806.78 v2(1342.62,-2908.32) ; v1(1340.91,-2359.41) 1336.97,-2363.35 1336.97,-2389.06 1603.49,-2655.57 1816.3,-2655.57 1831.2,-2640.67 v2(1857.18,-2640.67) 1857.18,-2694.4 1710.51,-2841.06 v2(1638.58,-2841.06) ; v2(2023.27,-2282.13) 2023.27,-2228.19 2078.9,-2172.56 2078.9,-2016.89 SD1.1@2060.83,-1998.82 ; v1(2281.94,-2917.64) 2281.94,-2920.13 2285.04,-2923.23 2265.08,-2923.23 2187.36,-3000.95 2187.36,-3075.87 2282.03,-3170.53 v1(2282.03,-3455.58) 2282.03,-3573.86 v1(2311.19,-3603.02) ; v2(2603.07,-4213.7) 2870.94,-4213.7 1.48@2875.83,-4208.82 1.47@2975.83,-4208.82
  Bottom Layer w20: JP6.6@195.83,-5323.46 986.5,-5323.46 1321.81,-4988.15 v2(1321.81,-4872.28)
I2C2_SCL: 1.65 JP1.1 R1.2 U2.10 U3.6 | length 2159.3
  Top Layer w8: U3.6@2203.75,-2473.82 2278.82,-2473.82 2327.31,-2425.33 JP1.1@2386.7,-2425.33 ; R1.2@2358.94,-2520.98 2360.79,-2519.13 2360.79,-2476.06 2386.7,-2450.15 JP1.1@2386.7,-2425.33 ; v1(2638.9,-2623.39) 2633.98,-2628.31 2541.65,-2628.31 2505.83,-2592.48 2505.83,-2453.58 2477.57,-2425.33 JP1.1@2386.7,-2425.33 ; v1(2761.65,-2536.85) 2690.2,-2536.85 U2.10@2690.2,-2526.42 2690.2,-2554.13 2795,-2658.94 3016.3,-2658.94 3090.75,-2733.39 3090.75,-3284.06 3065.98,-3308.82 1.65@2975.83,-3308.82
  Bottom Layer w8: v1(2638.9,-2623.39) 2690.79,-2623.39 2763.31,-2550.87 2761.65,-2549.21 v1(2761.65,-2536.85)
I2C2_SDA: 1.66 R5.2 U2.9 U3.5 | length 1881.6
  Top Layer w8: U3.5@2203.75,-2523.82 2246.89,-2523.82 2325.12,-2602.05 R5.2@2358.94,-2602.05 2358.94,-2643.94 2439.09,-2724.09 2503.46,-2724.09 2550.98,-2676.58 2652.44,-2676.58 2709.83,-2619.19 2670.51,-2579.87 ; U2.9@2670.51,-2526.42 2670.51,-2579.87 ; 1.66@2875.83,-3308.82 2875.83,-3302.13 2919.13,-3258.82 3013.07,-3258.82 3058.19,-3213.7 3058.19,-2804.61 3012.09,-2758.5 2849.14,-2758.5 2670.51,-2579.87
IO_POWER_ON: 1.56
Net1_49: 1.49 R11.1 | length 125
  Top Layer w16: 1.49@2975.83,-4108.82 R11.1@3100.83,-4108.82
Net1_50: 1.50 R12.2 | length 136.4
  Top Layer w8: 1.50@2875.83,-4114.25 1.50@2875.83,-4108.82
  Top Layer w16: R12.2@2769.45,-4173.5 2816.57,-4173.5 1.50@2875.83,-4114.25
Net1_51: 1.51 R13.1 | length 125
  Top Layer w20: 1.51@2975.83,-4008.82 R13.1@3100.83,-4008.82
Net1_52: 1.52 R14.2 | length 114.1
  Top Layer w8: 1.52@2870.83,-4003.82 1.52@2875.83,-4008.82
  Top Layer w16: R14.2@2770.83,-4003.82 2775.83,-4008.82 1.52@2875.83,-4008.82
Net1_53: 1.53 R15.1 | length 154
  Top Layer w16: 1.53@2975.83,-3908.82 3017.56,-3908.82 3087.56,-3838.82 R15.1@3100.83,-3838.82
Net1_54: 1.54 R16.2 | length 105
  Top Layer w16: R16.2@2770.83,-3908.82 1.54@2875.83,-3908.82
NetC1_2: C1.2 U2.8 | length 180.5
  Top Layer w8: U2.8@2650.83,-2526.42 2650.83,-2458.03 2680.04,-2428.82 C1.2@2750.83,-2428.82
NetC2_2: C2.2 R6.1 U1.19 U1.20 | length 191.9
  Top Layer w8: C2.2@1639.96,-4288.94 R6.1@1639.96,-4368.94 1639.96,-4416.89 1646.46,-4423.39 1647.48,-4422.36 U1.20@1675.2,-4422.36 U1.19@1675.2,-4447.95
NetC4_2: C4.2 R9.1 U4.19 U4.20 | length 167.2
  Top Layer w8: U4.19@1585.83,-3194.25 U4.20@1585.83,-3168.66 1585.83,-3121.42 C4.2@1596.97,-3110.28 R9.1@1673.15,-3110.28 ; R9.1@1669.8,-3118.7 R9.1@1671.54,-3116.97
NetC5_2: C5.2 R17.1 U5.19 U5.20 | length 199.5
  Top Layer w8: 2218.31,-4327.72 R17.1@2218.31,-4296.18 ; U5.20@2230.83,-4158.98 U5.19@2230.83,-4133.39
  Top Layer w16: R17.1@2218.31,-4296.18 C5.2@2218.31,-4211.18 2218.31,-4171.5 U5.20@2230.83,-4158.98
NetC6_2: C6.2 R19.1 U6.19 U6.20 | length 236.9
  Top Layer w8: R19.1@2143.5,-3537.56 2143.98,-3537.09 C6.2@2143.98,-3457.36 2143.98,-3428.39 2168.39,-3403.98 U6.20@2235.83,-3403.98 U6.19@2235.83,-3378.39
NetJP2_3: JP2.3 U2.4 | length 1802.9
  Top Layer w8: U2.4@2631.14,-2351.22 2631.14,-1445.64 2902.97,-1173.82 JP2.3@3415.83,-1173.82
NetJP2_4: JP2.4 U2.5 | length 1896.3
  Top Layer w8: U2.5@2611.46,-2351.22 2611.46,-1425.73 3013.37,-1023.82 JP2.4@3415.83,-1023.82
NetJP2_5: JP2.5 U2.6 | length 2186.9
  Top Layer w8: U2.6@2611.46,-2526.42 2611.46,-2492.01 2575.28,-2455.83 2575.28,-1422.31 3123.89,-873.7 3415.71,-873.7 JP2.5@3415.83,-873.82
NetJP2_6: JP2.6 U2.7 | length 2437.1
  Top Layer w8: U2.7@2631.14,-2526.42 2631.14,-2558.66 2615.04,-2574.76 2561.65,-2574.76 2540.47,-2553.58 2540.47,-1417.52 3234.17,-723.82 JP2.6@3415.83,-723.82
NetLED1_1: LED1.1 R21.1 | length 80.5
  Top Layer w8: LED1.1@1407.76,-2831.65 1409.45,-2829.96 R21.1@1487.52,-2829.96
NetLED2_1: LED2.1 R22.1 | length 80
  Top Layer w8: R22.1@2697.56,-2095.51 LED2.1@2777.56,-2095.51
NetLED3_1: LED3.1 R23.1 | length 75
  Top Layer w8: LED3.1@2950.67,-4572.8 R23.1@2950.67,-4497.8
NetLED4_A: LED4.A RN9.2 | length 365.2
  Bottom Layer w8: LED4.A@595.83,-2853.82 595.83,-2738.82 680.83,-2653.82 RN9.2@810.83,-2653.82
NetLED5_A: LED5.A RN9.3 | length 453.5
  Bottom Layer w8: LED5.A@595.83,-3053.82 595.83,-2949.45 655.04,-2890.24 655.04,-2799.61 700.83,-2753.82 RN9.3@810.83,-2753.82
NetLED6_A: LED6.A RN9.4 | length 495.5
  Bottom Layer w8: LED6.A@595.83,-3253.82 595.83,-3213.82 705.83,-3103.82 705.83,-2947.87 799.88,-2853.82 RN9.4@810.83,-2853.82
NetLED7_A: LED7.A RN9.5 | length 589.1
  Bottom Layer w8: LED7.A@595.83,-3453.82 595.83,-3348.82 656.83,-3287.82 656.83,-3227.82 735.83,-3148.82 735.83,-3065.59 810.83,-2990.59 RN9.5@810.83,-2953.82
NetLED8_A: LED8.A R24.2 | length 105
  Top Layer w8: LED8.A@595.83,-3653.82 R24.2@700.83,-3653.82
NetLED9_A: LED9.A R25.2 | length 105
  Top Layer w8: LED9.A@595.83,-3853.82 R25.2@700.83,-3853.82
NetLED10_A: LED10.A RN10.2 | length 336.4
  Bottom Layer w8: LED10.A@595.83,-1593.82 595.83,-1508.82 695.83,-1408.82 RN10.2@805.83,-1408.82
NetLED11_A: LED11.A RN10.3 | length 425.6
  Bottom Layer w8: LED11.A@595.83,-1788.82 630.83,-1788.82 660.83,-1758.82 660.83,-1588.82 740.83,-1508.82 RN10.3@805.83,-1508.82
NetLED12_A: LED12.A RN10.4 | length 516.8
  Bottom Layer w8: LED12.A@595.83,-1988.82 645.83,-1988.82 690.83,-1943.82 690.83,-1688.82 770.83,-1608.82 RN10.4@805.83,-1608.82
NetLED13_A: LED13.A RN10.5 | length 646.1
  Bottom Layer w8: LED13.A@595.83,-2188.82 670.83,-2188.82 720.83,-2138.82 720.83,-1733.82 745.83,-1708.82 RN10.5@805.83,-1708.82
NetLED14_A: LED14.A RN11.2 | length 528.8
  Bottom Layer w8: LED14.A@595.83,-4513.82 595.83,-4258.82 725.83,-4128.82 RN11.2@815.83,-4128.82
NetLED15_A: LED15.A RN11.3 | length 658.1
  Bottom Layer w8: LED15.A@595.83,-4713.82 650.83,-4713.82 670.83,-4693.82 670.83,-4288.82 730.83,-4228.82 RN11.3@815.83,-4228.82
NetLED16_A: LED16.A RN11.4 | length 749.5
  Bottom Layer w8: LED16.A@595.83,-4923.82 655.83,-4923.82 700.83,-4878.82 700.83,-4395.62 755.83,-4340.62 804.02,-4340.62 RN11.4@815.83,-4328.82
NetLED17_A: LED17.A RN11.5 | length 876.9
  Bottom Layer w8: LED17.A@595.83,-5123.82 700.83,-5123.82 730.83,-5093.82 730.83,-4463.82 765.83,-4428.82 RN11.5@815.83,-4428.82
NetLED18_A: LED18.A RN12.2 | length 447.3
  Bottom Layer w8: LED18.A@595.83,-443.82 660.83,-443.82 710.83,-493.82 710.83,-688.82 750.83,-728.82 RN12.2@810.83,-728.82
NetLED19_A: LED19.A RN12.3 | length 359.9
  Bottom Layer w8: LED19.A@595.83,-648.82 640.83,-648.82 665.83,-673.82 665.83,-793.82 700.83,-828.82 RN12.3@810.83,-828.82
NetLED20_A: LED20.A RN12.4 | length 233.1
  Bottom Layer w8: LED20.A@595.83,-848.82 625.83,-848.82 705.83,-928.82 RN12.4@795.83,-928.82
NetLED21_A: LED21.A RN12.5 | length 210.4
  Bottom Layer w8: LED21.A@595.83,-1053.82 770.83,-1053.82 RN12.5@795.83,-1028.82
NetR2_2: R2.2 U3.3 | length 132.1
  Top Layer w8: R2.2@1835.83,-2473.82 U3.3@1967.91,-2473.82